# Altium PCB CH32F&Vx0xR-R1-1v2.PcbDoc (part 2 of 2)
Units mil, origin at the board's own origin, x right, y up, seen from the top; angles counter-clockwise.
Board outline 2913.39 x 3372 mil, 2 copper layers (Top Layer, Bottom Layer); 78 components, 107 nets, 422 pads, 592 vias.
Unrouted connection lines stored in the file: 10.
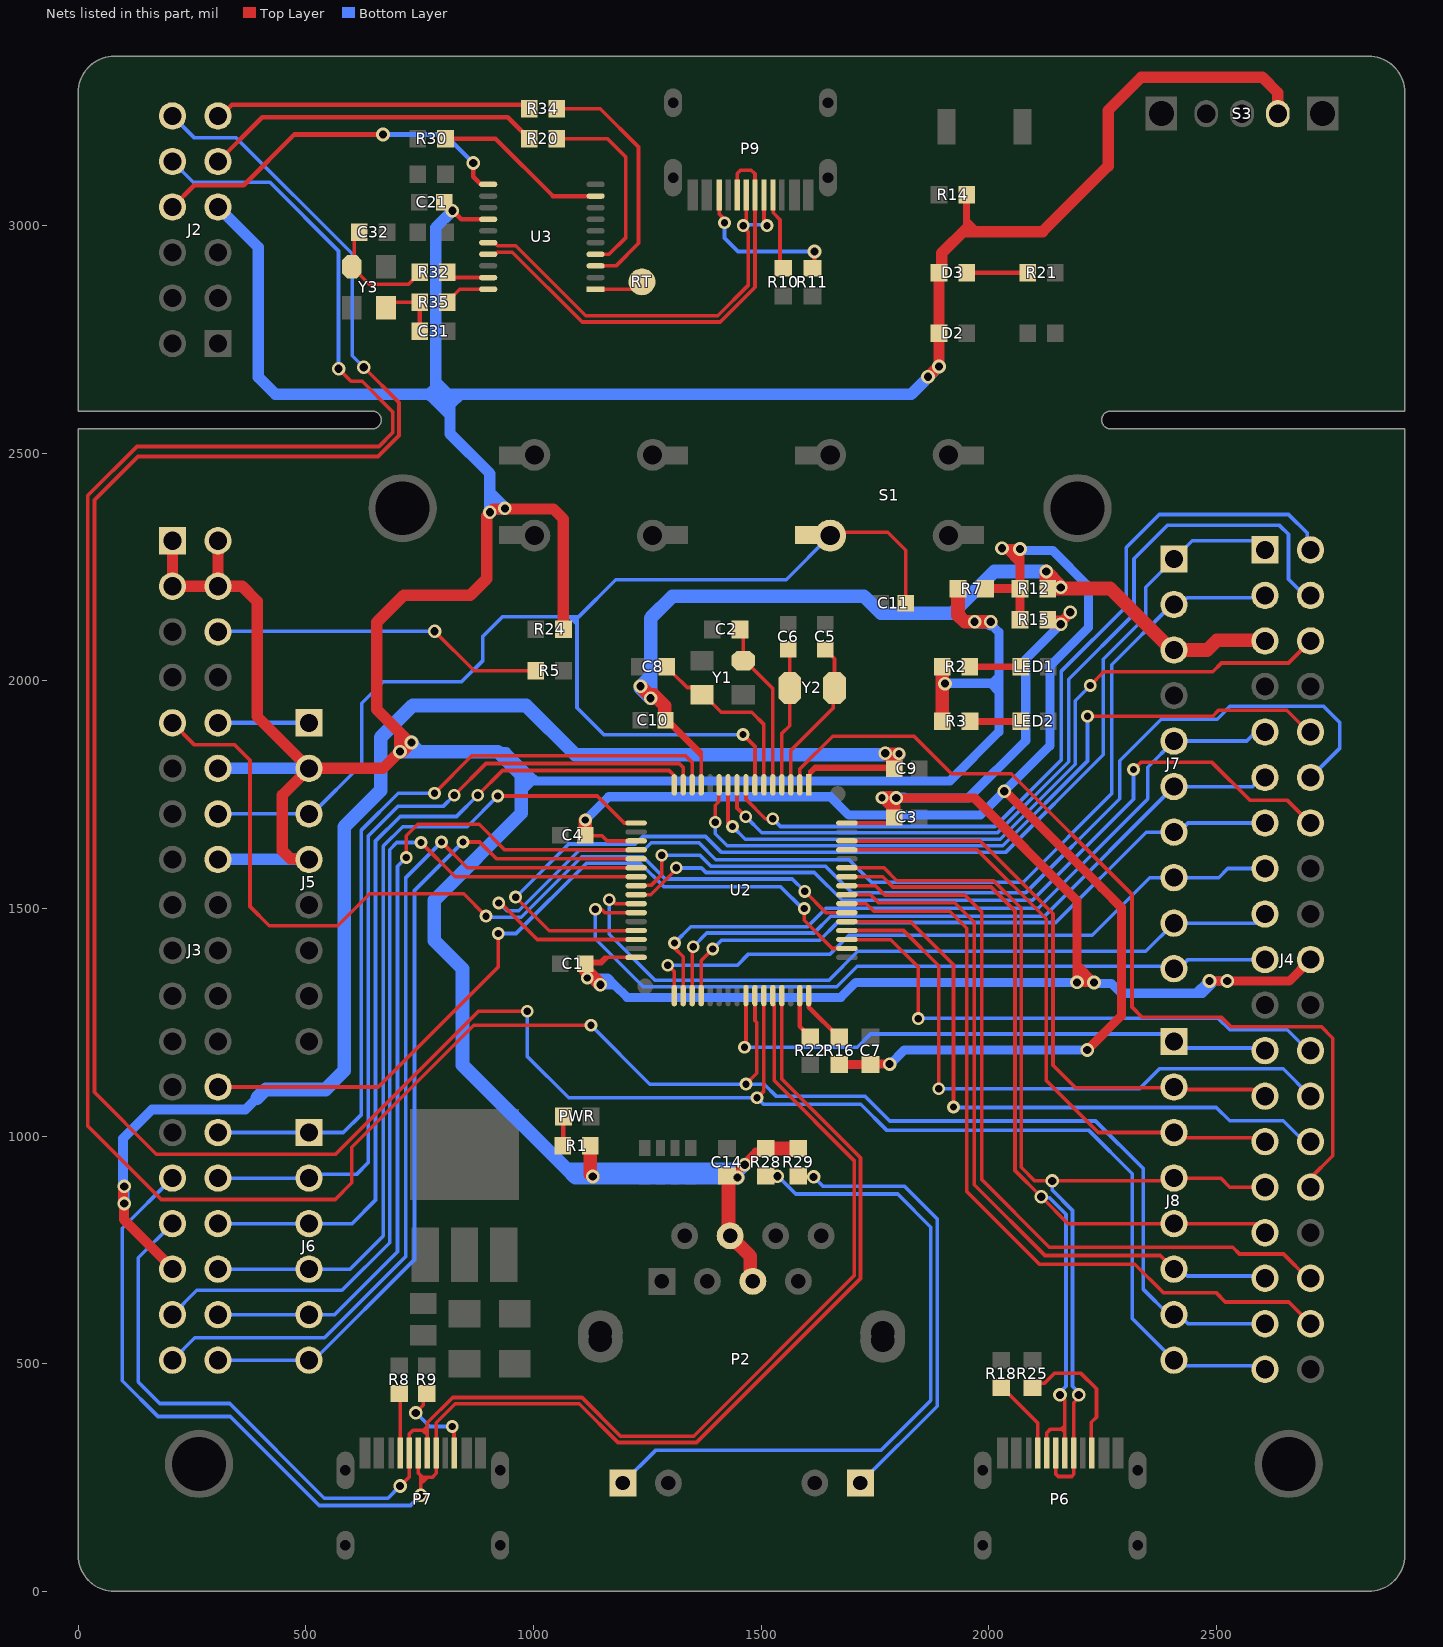
[diagram p2: the nets of this part, all layers, seen from the top]

## Via types
v1: diameter 24, hole 12, Top Layer to Bottom Layer, tented both sides, 436 vias
v2: diameter 30, hole 18, Top Layer to Bottom Layer, tented both sides, 83 vias
v3: diameter 28, hole 16, Top Layer to Bottom Layer, tented both sides, 73 vias

## Nets (pads, with @x,y where several pads share a name; then routed paths per layer and width w, separated by ;. In a path a pad name is that pad's centre, name@x,y a point inside that pad or via, vN(x,y) a via of type N, cw(c..) or ccw(c..) an arc to the next point about the centre after c; other vN are vias at no path point) (continued)
NetD3_2: D3.2 R21.2 | length 134.4
  Top Layer w10: D3.2@1951.15,2897 R21.2@2085.52,2897
NetJ3_6: J3.6 R5.1 | length 744.1
  Top Layer w8: v2(782.52,2109) 869.52,2022 R5.1@1004.89,2022
  Bottom Layer w8: J3.6@306.69,2107.81 319.24,2120.36 330.61,2109 v2(782.52,2109)
NetJ3_10: J3.10 J5.1 | length 200
  Bottom Layer w10: J3.10@306.69,1907.81 J5.1@506.69,1907.81
NetLED1_1: LED1.1 R2.2 | length 111.7
  Top Layer w15: R2.2@1958.15,2031 LED1.1@2069.89,2031
NetLED2_1: LED2.1 R3.2 | length 111.4
  Top Layer w15: R3.2@1958.52,1911 LED2.1@2069.89,1911
NetP2_9: P2.9 R28.2 | length 1540.9
  Top Layer w8: R28.2@1510.58,912.22 1535.3,912.22 v2(1535.52,912)
  Bottom Layer w8: P2.9@1196.06,237.91 1267.74,309.59 1762.84,309.59 1872.67,419.41 1872.67,799.96 1799.83,872.8 1575.96,872.8 1536.76,912 v2(1535.52,912)
NetP2_12: P2.12 R29.2 | length 999.2
  Top Layer w8: R29.2@1581.64,912.22 1587.88,918.46 1595.88,910.45 v2(1615.1,910.45)
  Bottom Layer w8: v2(1615.1,910.45) 1635.6,889.95 1814.62,889.95 1886.67,817.9 1886.67,406.86 P2.12@1717.72,237.91
NetP6_A5: P6.A5 R18.2 | length 164.9
  Top Layer w8: R18.2@2037.57,439.86 2107.6,369.83 P6.A5@2107.6,304.01
NetP6_B5: P6.B5 R25.2 | length 313.4
  Top Layer w8: R25.2@2095.87,447.25 2105.87,457.25 2122.48,457.25 2143.98,478.75 2202.63,478.75 2236.41,444.98 2236.41,382.33 2225.26,371.18 2225.26,304.46 P6.B5@2225.71,304.01
NetP7_A5: P7.A5 R8.2 | length 131.2
  Top Layer w8: P7.A5@707.36,304.01 R8.2@707.36,435.16
NetP7_B5: P7.B5 R9.2 | length 205.1
  Top Layer w8: v2(741,392) 757.91,408.91 757.91,427.57 R9.2@764.87,434.53 ; v3(821.51,362.04) 825.06,358.49 825.06,304.42 P7.B5@825.47,304.01 P7.B5@825.47,304.01
  Bottom Layer w8: v2(741,392) 742.13,392 772.09,362.04 v3(821.51,362.04)
NetP9_A5: P9.A5 R10.1 | length 180.8
  Top Layer w8: P9.A5@1525.81,3067.24 1526.21,3066.85 1526.21,3028.31 1541.39,3013.13 R10.1@1541.39,2892.86
NetP9_B5: P9.B5 R11.1 | length 355
  Top Layer w8: P9.B5@1407.7,3067.24 1407.7,3025.48 1419.49,3013.69 v3(1419.49,3006.6) v3@1419.49,2999.52 ; R11.1@1612.62,2906.21 1616.94,2910.53 v2(1616.94,2943.28)
  Bottom Layer w8: v3(1419.49,3006.6) 1419.49,2972.68 1448.89,2943.28 v2(1616.94,2943.28)
NetPWR_1: PWR.1 R1.1 | length 64.7
  Top Layer w10: R1.1@1064.15,978.99 1065.53,980.37 PWR.1@1065.53,1043.16
NetR16_2: R16.2 U2.48 | length 119.2
  Top Layer w10: U2.48@1604.33,1308.79 1604.68,1308.45 1604.68,1283.46 1670.29,1217.85 R16.2@1671.27,1217.85
NetR22_2: R22.2 U2.47 | length 101.1
  Top Layer w10: U2.47@1584.65,1308.79 1584.65,1240.91 1593.42,1232.14 1593.42,1231.16 1606.72,1217.85 R22.2@1607.71,1217.85
NRST: C11.2 J3.14 J5.3 pad.@1604.53,2320.31 S1.1 U2.7 | length 2751.7
  Top Layer w8: v3(1459.98,1882.03) 1486.22,1855.79 U2.7@1486.22,1771.55 ; S1.1@1651.77,2319.23 1658.87,2326.32 1778.22,2326.32 1817.54,2287.01 C11.2@1817.54,2170.72
  Bottom Layer w8: J3.14@306.69,1707.81 J5.3@506.69,1707.81 513.47,1707.81 622.57,1816.92 622.57,1950.66 670.02,1998.11 841.82,1998.11 888.64,2044.93 888.64,2098.07 931.1,2140.53 1080.01,2140.53 ; v3(1459.98,1882.03) 1154.35,1882.03 1095.42,1940.97 1095.42,2125.12 ; S1.1@1651.77,2319.23 1554.73,2222.18 1180.28,2222.18 1098.63,2140.53 ; 1080.01,2140.53 1098.63,2140.53 ; 1080.01,2140.53 1087.71,2132.83 ; 1087.71,2132.83 1090.93,2132.83 1095.42,2137.32 ; 1087.71,2132.83 1095.42,2125.12 ; 1095.42,2125.12 1095.42,2137.32 ; 1095.42,2137.32 1098.63,2140.53
OSC_IN: C32.2 R32.2 Y3.1 | length 258.7
  Top Layer w8: C32.2@617.19,2985.39 605.72,2973.91 605.72,2914.92 Y3.1@600.76,2909.96 639.24,2871.47 725.33,2871.47 750.06,2896.21 R32.2@750.06,2897.19
OSC_OUT: C31.2 R35.2 Y3.3 | length 143.3
  Top Layer w8: Y3.3@672.25,2835.83 676,2832.07 R35.2@750.06,2832.07
  Top Layer w10: C31.2@750.06,2768.11 R35.2@750.06,2832.07
PA0: J3.28 J6.1 U2.14 | length 1805.8
  Top Layer w8: v3(782.16,1753.23) 864.41,1835.48 1333.82,1835.48 1348.43,1820.87 U2.14@1348.43,1771.55
  Bottom Layer w8: J3.28@306.69,1007.81 J6.1@506.69,1007.81 581.92,1007.81 621.74,1047.63 621.74,1672.22 702.75,1753.23 v3(782.16,1753.23)
PA1: J3.30 J6.2 U2.15 | length 1861.5
  Top Layer w8: v3(825.69,1748.84) 895.41,1818.56 1319.98,1818.56 1328.74,1809.8 U2.15@1328.74,1771.55
  Bottom Layer w8: J3.30@306.69,907.81 J6.2@506.69,907.81 514.77,915.88 610.99,915.88 637.02,941.91 637.02,1659.43 701.89,1724.3 801.14,1724.3 v3(825.69,1748.84)
PA2: J3.32 J6.3 U2.16 | length 1901.5
  Top Layer w8: v3(877.52,1749) 931.59,1803.07 1297.61,1803.07 1307.15,1793.53 1307.15,1792.2 1309.06,1790.3 U2.16@1309.06,1771.55
  Bottom Layer w8: J3.32@306.69,807.81 J6.3@506.69,807.81 601.15,807.81 652.8,859.46 652.8,1648.21 706.84,1702.25 830.77,1702.25 v3(877.52,1749)
PA3: J3.34 J6.4 U2.17 | length 1875.2
  Top Layer w8: v3(921.52,1747) 1139.74,1747 1198.94,1687.81 U2.17@1225.32,1687.81
  Bottom Layer w8: J3.34@306.69,707.81 J6.4@506.69,707.81 596.58,707.81 669.6,780.83 669.6,1637.11 712.28,1679.79 854.31,1679.79 v3(921.52,1747)
PA4: J3.36 J6.5 U2.20 | length 1912.1
  Top Layer w8: v3(720.52,1612) 720.52,1660.01 745.53,1685.02 880.35,1685.02 936.62,1628.75 U2.20@1225.32,1628.75
  Bottom Layer w8: J3.36@306.69,607.81 562.84,607.81 701.17,746.14 701.17,1592.65 v3(720.52,1612)
PA5: J3.38 J6.6 U2.21 | length 1880.4
  Top Layer w8: v3(844.86,1646.13) 881.4,1646.13 918.46,1609.07 U2.21@1225.32,1609.07
  Bottom Layer w8: J3.38@306.69,507.81 517.18,507.81 738.34,728.97 738.34,1539.62 v3(844.86,1646.13)
PA6: J3.37 U2.22 | length 2000.9
  Top Layer w8: v3(797.52,1646) 854.14,1589.38 U2.22@1225.32,1589.38
  Bottom Layer w8: J3.37@206.69,507.81 255.83,556.94 540.48,556.94 719.5,735.96 719.5,1567.98 v3(797.52,1646)
PA7: J3.35 U2.23 | length 1984.8
  Top Layer w8: v3(752.81,1644.84) 827.95,1569.7 U2.23@1225.32,1569.7
  Bottom Layer w8: J3.35@206.69,607.81 260.02,661.14 578.93,661.14 683.86,766.07 683.86,1629.02 699.67,1644.84 v3(752.81,1644.84)
PA8: J4.23 J8.1 U2.41 | length 1284.3
  Top Layer w8: v3@1466.54,1195 U2.41@1466.54,1308.79
  Bottom Layer w8: v3(1463.52,1195) 1710.84,1195 1740.25,1224.41 2390.09,1224.41 J8.1@2406.69,1207.81 2421.08,1193.42 2601.08,1193.42 J4.23@2606.69,1187.81
PA9: J2.10 J4.35 J8.7 U2.42 | length 6510.8
  Top Layer w8: v2(571.65,2685.74) 599.08,2658.32 623.47,2658.32 690.29,2591.5 690.29,2544.8 660.5,2515.01 128.7,2515.01 20.76,2407.06 20.76,1022.01 182.06,860.71 564.06,860.71 600.67,897.31 600.67,975.62 868.61,1243.56 v3(1126.11,1243.56) ; v3(1466.57,1114.25) 1466.57,1114.52 1490,1137.95 1490,1249.86 1486.22,1253.64 U2.42@1486.22,1308.79
  Bottom Layer w8: J2.10@206.69,3141 252.48,3095.21 420.74,3095.21 571.47,2944.48 571.47,2685.93 v2(571.65,2685.74) ; v3(1126.11,1243.56) 1255.43,1114.25 v3(1466.57,1114.25) 1506.54,1114.25 1533.56,1087.23 1728.67,1087.23 1782.53,1033.37 2234.4,1033.37 2339.57,928.2 2339.57,663.28 2395.04,607.81 J8.7@2406.69,607.81 2417.38,607.81 2437.38,587.81 J4.35@2606.69,587.81
PA10: J2.12 J4.37 J8.8 U2.43 | length 6549.2
  Top Layer w8: v2(626.82,2688.76) 704.29,2611.29 704.29,2539 658.11,2492.82 131.15,2492.82 35.61,2397.28 35.61,1096.07 171.32,960.36 564.73,960.36 878.78,1274.41 v3(986.27,1274.41) ; v3(1490.86,1084.31) 1505.91,1099.35 U2.43@1505.91,1308.79
  Bottom Layer w8: J2.12@206.69,3241 254.93,3192.76 347.08,3192.76 601.62,2938.22 601.62,2713.96 v2(626.82,2688.76) ; v3(986.27,1274.41) 986.27,1175.01 1076.96,1084.31 v3(1490.86,1084.31) 1505.16,1070.01 1718.77,1070.01 1776.23,1012.56 2220.19,1012.56 2315.23,917.51 2315.23,599.27 J8.8@2406.69,507.81 2420.76,507.81 2433.02,495.55 2598.95,495.55 J4.37@2606.69,487.81
PA11: J3.31 P7.A7 P7.B7 U2.44 | length 3159.6
  Top Layer w8: v2(706.77,231.57) 727.25,252.04 P7.B7@727.25,304.01 ; P7.B7@727.05,304.01 727.05,345.56 735.3,353.81 758.4,353.81 ; P7.A7@766.62,303.81 766.62,343.71 ; U2.44@1525.59,1308.79 1525.59,1290.05 1528.56,1287.07 1528.56,1122.15 1704.03,946.69 1704.03,693.06 1351.98,341.01 1191.05,341.01 1106.12,425.93 822.14,425.93 766.62,370.41 766.62,362.02 ; 758.4,353.81 765.51,353.81 766.62,352.69 ; 758.4,353.81 758.4,351.92 766.62,343.71 ; 758.4,353.81 766.62,362.02 ; 766.62,343.71 766.62,352.69 ; 766.62,352.69 766.62,362.02
  Bottom Layer w8: J3.31@206.69,807.81 131.55,732.66 131.55,460.08 179.04,412.59 332.27,412.59 540.05,204.81 680.02,204.81 v2(706.77,231.57)
PA12: J3.29 P7.A6 P7.B6 U2.45 | length 3370.3
  Top Layer w8: P7.A6@746.93,303.81 746.93,259.83 752.4,254.36 ; v2(752.4,211.23) 752.4,236.26 ; U2.45@1545.28,1308.79 1545.28,1125.24 1718.03,952.49 1718.03,687.27 1357.77,327.01 1185.25,327.01 1100.32,411.93 827.94,411.93 786.1,370.1 P7.B6@786.1,304.01 786.3,303.81 786.3,259.26 777.81,250.77 766.9,250.77 ; 752.4,236.26 752.4,254.36 ; 752.4,236.26 759.65,243.51 ; 752.4,254.36 756,250.77 ; 756,250.77 766.9,250.77 ; 756,250.77 759.65,247.11 759.65,243.51 ; 759.65,243.51 766.9,250.77
  Bottom Layer w8: J3.29@206.69,907.81 96.59,797.71 96.59,462.39 174.79,384.19 333.38,384.19 528.98,188.58 729.75,188.58 v2(752.4,211.23)
PA15: J3.26 U2.50 | length 1720.9
  Top Layer w8: J3.26@306.69,1107.81 658.87,1107.81 922.52,1371.46 v3(922.52,1445) ; v3(1594.53,1499.77) 1594.53,1474.04 1656.35,1412.22 U2.50@1688.07,1412.22
  Bottom Layer w8: v3(922.52,1445) 961.46,1445 1116.14,1599.68 1234.44,1599.68 1286.35,1547.78 1542.5,1547.78 1590.51,1499.77 v3(1594.53,1499.77)
PB0: J4.17 J7.9 U2.26 | length 1680.9
  Top Layer w8: v3(1166.28,1518.98) 1171.45,1518.98 1179.79,1510.64 U2.26@1225.32,1510.64
  Bottom Layer w8: v3(1166.28,1518.98) 1166.28,1443.29 1267.54,1342.03 1648.5,1342.03 1712.34,1405.87 2344.75,1405.87 J7.9@2406.69,1467.81 2586.69,1467.81 J4.17@2606.69,1487.81
PB1: J4.19 J7.10 U2.27 | length 1706.2
  Top Layer w8: v3(1135.73,1498.54) 1148.94,1498.54 1156.52,1490.96 U2.27@1225.32,1490.96
  Bottom Layer w8: v3(1135.73,1498.54) 1135.73,1433.35 1241.05,1328.03 1666.05,1328.03 1710.95,1372.93 2387.5,1372.93 2398.33,1362.1 2411.67,1362.1 2437.38,1387.81 J4.19@2606.69,1387.81
PB3: J4.36 U2.55 | length 1739.5
  Top Layer w8: U2.55@1688.07,1510.64 1730.88,1510.64 1747.71,1493.82 1914.11,1493.82 1951.5,1456.43 1951.5,878.43 2111.45,718.48 2320.7,718.48 2382.88,656.3 2498.93,656.3 2519.49,635.74 2658.77,635.74 J4.36@2706.69,587.81
PB4: J4.33 J8.6 U2.56 | length 1605.5
  Top Layer w8: U2.56@1688.07,1530.33 1739.86,1530.33 1757.71,1512.48 1925.37,1512.48 1967.84,1470.01 1967.84,893.23 2123.16,737.91 2376.6,737.91 J8.6@2406.69,707.81
  Bottom Layer w8: J8.6@2406.69,707.81 2420.76,707.81 2435.79,692.78 2601.72,692.78 J4.33@2606.69,687.81
PB5: J4.34 U2.57 | length 1720.1
  Top Layer w8: U2.57@1688.07,1550.01 1751.05,1550.01 1771.41,1529.65 1947.07,1529.65 1984.28,1492.44 1984.28,904.58 2132.77,756.09 2535.79,756.09 2550.74,741.14 2647.4,741.14 2700.73,687.81 J4.34@2706.69,687.81
PB6: J4.31 J8.5 P6.A7 P6.B7 U2.58 | length 2272.7
  Top Layer w8: U2.58@1688.07,1569.7 1767.05,1569.7 1789.52,1547.23 2004.65,1547.23 2057.35,1494.53 2057.35,924.54 v2(2115,866.89) 2174.08,807.81 J8.5@2406.69,807.81 J4.31@2606.69,807.81 ; P6.B7@2127.28,304.01 2127.28,348 2135.7,356.41 2159.33,356.41 ; v2(2156.25,431.6) 2166.65,421.2 2166.65,363.74 ; P6.A7@2166.65,304.01 2166.65,350.13 ; 2159.33,356.41 2160.37,356.41 2166.65,350.13 ; 2159.33,356.41 2166.65,363.74 ; 2166.65,350.13 2166.65,363.74
  Bottom Layer w8: v2(2115,866.89) 2117.21,864.68 2133.31,864.68 2169.64,828.36 2169.64,450.75 2156.25,437.37 v2(2156.25,431.6)
PB7: J4.29 J8.4 P6.A6 P6.B6 U2.59 | length 2304.6
  Top Layer w8: U2.59@1688.07,1589.38 1769.72,1589.38 1797.87,1561.23 2010.45,1561.23 2071.35,1500.33 2071.35,931.33 2101.08,901.59 v2(2139.18,901.59) 2400.48,901.59 J8.4@2406.69,907.81 2509.47,907.81 2529.47,887.81 J4.29@2606.69,887.81 ; P6.A6@2146.97,304.01 2146.97,257.92 2152.56,252.34 2181.65,252.34 2186.34,257.02 P6.B6@2186.34,304.01 2186.34,414.57 v2@2197.42,425.65
  Bottom Layer w8: v2@2138.53,901.24 2139.14,900.63 2139.14,881.49 2183.89,836.75 2183.89,450.6 2197.42,437.07 v2(2197.42,431.6)
PB8: J4.27 J8.3 U2.61 | length 1392.4
  Top Layer w8: U2.61@1688.07,1628.75 1974.84,1628.75 2125.84,1477.75 2125.84,1122.14 2240.17,1007.81 2420.76,1007.81 2431.99,996.58 2597.92,996.58 J4.27@2606.69,987.81
PB9: J4.25 J8.2 U2.62 | length 1347.2
  Top Layer w8: U2.62@1688.07,1648.44 1980.95,1648.44 2140.94,1488.45 2140.94,1155.75 2190.61,1106.08 2404.96,1106.08 J8.2@2406.69,1107.81 2412.15,1102.35 2578.08,1102.35 2592.62,1087.81 J4.25@2606.69,1087.81
PB10: J4.1 J7.1 U2.29 | length 2455.7
  Top Layer w8: v3(960.52,1525) 1034.52,1451 1224.73,1451 U2.29@1225.32,1451.59
  Bottom Layer w8: v3(960.52,1525) 1077.2,1641.68 1223.56,1641.68 1240.1,1658.22 1377.6,1658.22 1411.91,1623.91 2037.89,1623.91 2251.47,1837.49 2251.47,2047.47 2344.61,2140.61 2344.61,2205.72 2380.69,2241.81 2446.69,2307.81 J4.1@2606.69,2307.81
PB11: J4.3 J7.2 U2.30 | length 2549.4
  Top Layer w8: v3(923.63,1511.98) 927.74,1511.98 1007.82,1431.9 U2.30@1225.32,1431.9
  Bottom Layer w8: v3(923.63,1511.98) 923.88,1511.98 941.01,1494.86 967.35,1494.86 1100.17,1627.68 1241.98,1627.68 1258.51,1644.22 1363.32,1644.22 1400.39,1607.16 1692.77,1607.16 1742.11,1557.81 2075.33,1557.81 2270.11,1752.59 2270.11,2035.5 2402.42,2167.81 2420.76,2167.81 2435.73,2182.78 2601.66,2182.78 J4.3@2606.69,2187.81
PB12: J4.15 J7.8 U2.33 | length 1472.3
  Top Layer w8: v3(1294.92,1375.56) 1309.06,1361.43 U2.33@1309.06,1308.79
  Bottom Layer w8: v3(1294.92,1375.56) 1447.9,1375.56 1472.23,1399.9 1651.51,1399.9 1692.73,1441.12 2227.03,1441.12 2353.72,1567.81 J7.8@2406.69,1567.81 2504.78,1567.81 2524.78,1587.81 J4.15@2606.69,1587.81
PB13: J4.9 J7.5 U2.34 | length 1661.5
  Top Layer w8: v3(1309.63,1424.33) 1309.63,1413.18 1328.74,1394.07 U2.34@1328.74,1308.79
  Bottom Layer w8: v3(1309.63,1424.33) 1345.37,1460.07 1601.87,1460.07 1642.11,1500.31 2108.75,1500.31 2349.17,1740.73 2349.17,1810.29 J7.5@2406.69,1867.81 2566.69,1867.81 J4.9@2606.69,1907.81
PB14: J4.11 J7.6 U2.35 | length 1519.6
  Top Layer w8: U2.35@1348.43,1308.79 1348.43,1416.12 v3(1350.67,1416.12)
  Bottom Layer w8: v3(1350.67,1416.12) 1380.63,1446.07 1615.91,1446.07 1653.01,1483.18 2122.06,1483.18 J7.6@2406.69,1767.81 2579.66,1767.81 2599.66,1787.81 J4.11@2606.69,1787.81
PB15: J4.13 J7.7 U2.36 | length 1440.6
  Top Layer w8: U2.36@1368.11,1308.79 1368.11,1385.58 v3(1393.36,1410.83)
  Bottom Layer w8: v3(1393.36,1410.83) 1412.72,1430.19 1628.84,1430.19 1667.81,1469.16 2146.88,1469.16 2345.53,1667.81 2417.38,1667.81 2437.38,1687.81 J4.13@2606.69,1687.81
PC0: J4.2 U2.8 | length 1820.1
  Top Layer w8: U2.8@1466.54,1771.55 1466.54,1739.82 1509,1697.36 v3(1525.18,1697.36)
  Bottom Layer w8: v3(1525.18,1697.36) 1542.39,1680.15 2013.38,1680.15 2158.78,1825.55 2158.78,2020.45 2301.7,2163.37 2301.7,2292.8 2374.52,2365.63 2658.44,2365.63 2699.78,2324.29 2699.78,2294.72 J4.2@2706.69,2287.81
PC1: J4.4 U2.9 | length 1912.6
  Top Layer w8: U2.9@1446.85,1771.55 1446.85,1720.6 1466.21,1701.24 v3@1466.21,1699.81
  Bottom Layer w8: v3@1466.21,1699.81 1467.64,1699.81 1501.3,1666.15 2019.18,1666.15 2175.49,1822.46 2175.49,2003.39 2318.81,2146.71 2318.81,2268.37 2391.95,2341.51 2638.67,2341.51 2658.28,2321.91 2658.28,2223.36 2693.83,2187.81 J4.4@2706.69,2187.81
  other v3: 1466.21,1701.81
PC2: J4.6 U2.10 | length 1636.3
  Top Layer w8: U2.10@1427.17,1771.55 1427.17,1689.93 v3@1435.17,1681.93 ; v3(2222.52,1990) 2252.52,2020 2491.68,2020 2511.04,2039.36 2658.24,2039.36 J4.6@2706.69,2087.81
  Bottom Layer w8: v3(1437.17,1679.93) 1464.95,1652.15 2024.98,1652.15 2189.81,1816.98 2189.81,1956.39 v3@2222.97,1989.55
PC3: J4.10 U2.11 | length 1618.2
  Top Layer w8: v3(1399.01,1689.52) 1399.01,1726.58 1406.95,1734.51 1406.95,1771.01 U2.11@1407.48,1771.55 ; v3(2216.67,1922.43) 2491.68,1922.43 2504.52,1935.26 2654.59,1935.26 2687.39,1902.47 J4.10@2701.36,1902.47
  Bottom Layer w8: v3(1399.01,1689.52) 1399.01,1664.41 1425.26,1638.15 2030.78,1638.15 2216.67,1824.04 v3(2216.67,1922.43)
PC4: J4.12 U2.24 | length 2013.2
  Top Layer w8: U2.24@1225.32,1550.01 1226.04,1550.74 1257.77,1550.74 1281.52,1574.49 v3(1281.52,1617)
  Bottom Layer w8: v3(1281.52,1617) 1365.58,1617 1389.42,1593.16 1640.87,1593.16 1699.09,1534.94 2081.45,1534.94 2287.69,1741.18 2287.69,1824.68 2378.62,1915.61 2501.57,1915.61 2530.59,1944.64 2734.44,1944.64 2771.22,1907.86 2771.22,1852.33 J4.12@2706.69,1787.81
PC5: J4.14 U2.25 | length 1756.7
  Top Layer w8: U2.25@1225.32,1530.33 1257.15,1530.33 1313.21,1586.39 v3(1313.21,1589.74) ; v3(2317.89,1805.29) 2333.55,1820.95 2490.15,1820.95 2572.93,1738.17 2655.01,1738.17 2705.37,1687.81 J4.14@2706.69,1687.81
  Bottom Layer w8: v3(1313.21,1589.74) 1314.01,1588.94 1368.61,1588.94 1378.61,1578.94 1616.72,1578.94 1677.8,1517.86 2095.89,1517.86 2317.89,1739.86 v3(2317.89,1805.29)
PC6_305: R30.2 U3.9 | length 382.2
  Top Layer w10: R30.2@806.33,3191.22 916.35,3191.22 1042.51,3065.06 U3.9@1136.27,3065.06
PC10: J4.24 U2.51 | length 1186.6
  Top Layer w8: U2.51@1688.07,1431.9 1688.31,1431.66 1784.75,1431.66 1844.85,1371.56 v3(1844.85,1258.11)
  Bottom Layer w8: v3(1844.85,1258.11) 1845.32,1258.58 2504.4,1258.58 2529.04,1233.94 2655.39,1233.94 2701.52,1187.81 J4.24@2706.69,1187.81
PC11: J4.26 U2.52 | length 1363.9
  Top Layer w8: U2.52@1688.07,1451.59 1812.51,1451.59 1889.98,1374.12 v3(1889.98,1103.94)
  Bottom Layer w8: v3(1889.98,1103.94) 2331.18,1103.94 2375.05,1147.81 2646.69,1147.81 J4.26@2706.69,1087.81
PC12: J4.28 U2.53 | length 1401.8
  Top Layer w8: U2.53@1688.07,1471.27 1827.51,1471.27 1922.52,1376.26 v3(1922.52,1064)
  Bottom Layer w8: v3(1922.52,1064) 1923.61,1062.91 2499.88,1062.91 2529.27,1033.51 2646.92,1033.51 2692.62,987.81 J4.28@2706.69,987.81
PC13: J4.30 U2.2 | length 1983
  Top Layer w8: U2.2@1584.65,1771.55 1584.65,1806.35 1656.94,1878.65 1835.64,1878.65 1918.22,1796.06 2048.97,1796.06 2314.39,1530.64 2314.39,1283.6 2337.24,1260.75 2511.2,1260.75 2531.32,1240.62 2730.2,1240.62 2755.72,1215.11 2755.72,956.83 J4.30@2706.69,907.81
PC14: C5.1 U2.3 Y2.1 | length 341.6
  Top Layer w8: U2.3@1564.96,1771.55 1564.96,1847.07 1658.28,1940.39 1658.28,1977.15 Y2.1@1661,1979.88 ; C5.1@1640.33,2069.42 1661,2048.74 Y2.1@1661,1984.51
PC15: C6.1 U2.4 Y2.2 | length 301.9
  Top Layer w8: U2.4@1545.28,1771.55 1545.28,1884.4 1562.58,1901.71 Y2.2@1562.58,1979.88 ; C6.1@1559.01,2069.42 1562.58,2065.85 Y2.2@1562.58,1984.51
PD0: C2.2 U2.5 Y1.1 | length 373.6
  Top Layer w8: C2.2@1453.31,2112.89 1460.4,2105.8 Y1.1@1460.4,2044.51 1464.33,2044.51 1525.59,1983.25 U2.5@1525.59,1771.55
PD0_305: R32.1 U3.19 | length 97.6
  Top Layer w8: R32.1@806.42,2894.92 815.38,2885.96 U3.19@900.27,2885.96
PD1: C8.2 U2.6 Y1.3 | length 399.2
  Top Layer w8: C8.2@1292.55,2031.15 1292.55,2030.17 1306.86,2015.86 1337.32,1985.4 1354.16,1985.4 Y1.3@1369.84,1969.71 1373.78,1969.71 1412.24,1931.25 1478.95,1931.25 1505.91,1904.3 U2.6@1505.91,1771.55
PD1_305: R35.1 U3.20 | length 98.2
  Top Layer w8: R35.1@816.84,2833.22 816.84,2839.2 838,2860.36 U3.20@900.27,2860.36
PD2: J3.9 U2.54 | length 2010.5
  Top Layer w8: J3.9@206.69,1907.81 255.1,1859.4 343.47,1859.4 376.98,1825.9 376.98,1504.52 419.63,1461.88 569.65,1461.88 639.92,1532.15 846.64,1532.15 v3(895.51,1483.28) ; v3(1595.49,1537.62) 1642.15,1490.96 U2.54@1688.07,1490.96
  Bottom Layer w8: v3(895.51,1483.28) 897.93,1480.86 973.17,1480.86 1105.99,1613.68 1240.24,1613.68 1289.19,1564.74 1568.37,1564.74 v3(1595.49,1537.62)
RST0: J2.8 U3.11 | length 822.4
  Top Layer w10: J2.8@206.69,3041 254.49,3088.8 363.11,3088.8 474.56,3200.25 v2(669.17,3200.25) ; v2(867.45,3137.52) 867.45,3107.67 884.08,3091.04 899.88,3091.04 U3.11@900.27,3090.66
  Bottom Layer w10: v2(669.17,3200.25) 804.73,3200.25 v2(867.45,3137.52)
RT: RT.1 U3.1 | length 108.4
  Top Layer w8: U3.1@1136.27,2860.36 1221.8,2860.36 RT.1@1237.99,2876.56
RX_OUT: J2.9 R20.1 | length 743.7
  Top Layer w10: J2.9@306.69,3141 403.88,3238.19 943.15,3238.19 975.82,3205.51 976.81,3205.51 990.11,3192.21 R20.1@990.11,3191.22
TX_OUT: J2.11 R34.1 | length 696.9
  Top Layer w10: J2.11@306.69,3241 313.29,3241 337.55,3265.26 981.92,3265.26 R34.1@990.11,3257.07
UART3_RX: R20.2 U3.4 | length 427.1
  Top Layer w8: R20.2@1050.74,3191.22 1161.86,3191.22 1202.81,3150.27 1202.81,2974.09 1165.88,2937.16 U3.4@1136.27,2937.16
UART3_TX: R34.2 U3.3 | length 541.2
  Top Layer w8: R34.2@1050.74,3257.07 1146.43,3257.07 1230.51,3173 1230.51,2961.13 1180.94,2911.56 U3.3@1136.27,2911.56
USB_N: P9.A7 P9.B7 U3.16 | length 993.6
  Top Layer w8: U3.16@900.27,2962.76 914.01,2962.76 920.95,2955.82 960.98,2955.82 1114.59,2802.21 1404.36,2802.21 1471.9,2869.75 1471.9,2985.4 1460.4,2996.9 v3(1460.4,3000.09) 1460.4,3005.5 1466.76,3011.86 P9.A7@1466.76,3067.24 ; P9.B7@1506.13,3067.24 1506.13,3013.61 1508.68,3011.05 1508.68,3009.33 1510.92,3007.09 v3@1512.51,3007.09 ; v3@1512.51,2994.68 v3(1512.51,3000.09)
  Bottom Layer w8: v3(1460.4,3000.09) 1462.06,3001.75 1510.85,3001.75 v3(1512.51,3000.09)
USB_P: P9.A6 P9.B6 U3.17 | length 1025.5
  Top Layer w8: U3.17@900.27,2937.16 915.35,2937.16 920.01,2941.82 953.11,2941.82 1106.72,2788.21 1410.16,2788.21 1486.44,2864.5 P9.A6@1486.44,3067.24 1486.44,3113.79 1478.43,3121.8 1454.5,3121.8 1447.07,3114.38 P9.B6@1447.07,3067.24
VBAT: C9.1 J3.33 U2.1 | length 3418.8
  Top Layer w8: U2.1@1604.21,1792.09 U2.1@1606.24,1794.12 ; U2.1@1604.33,1771.55 1606.24,1773.45 U2.1@1606.24,1794.12 ; C9.1@1792.54,1803.24 1791.84,1803.94 1789.51,1806.27 1618.39,1806.27 ; C9.1@1792.54,1812.24 1791.84,1812.24 1618.19,1812.24 1612.21,1806.27 ; U2.1@1606.24,1794.12 1606.24,1800.29 1612.21,1806.27 ; U2.1@1606.24,1794.12 1618.39,1806.27 ; 1612.21,1806.27 1618.39,1806.27
  Top Layer w22: v2@99.79,849.47 99.79,816.82 206.69,709.92 J3.33@206.69,707.81 ; v2(100.98,852) 99.8,852 98.19,853.61 98.19,888 99.8,889.61 v2(100.98,889.61)
  Top Layer w30: v2(1772.28,1841.15) 1774.4,1839.02 1801.84,1839.02 1795.54,1832.73 C9.1@1795.54,1806.24 ; C9.1@1791.84,1803.94 1791.84,1812.24 v3@1791.84,1838.02
  Bottom Layer w22: v2@98.19,889.54 100.98,886.75 v2(100.98,852) ; v2(100.98,889.61) 98.12,892.47 98.12,994.52 161.8,1058.2 367.23,1058.2 392.61,1083.58
  Bottom Layer w30: 392.61,1083.58 411.59,1102.56 542.75,1102.56 583.71,1143.53 583.71,1678.94 664.03,1759.26 664.03,1875.71 734.31,1945.99 983.53,1945.99 1091.5,1838.02 1772.28,1838.02 v3@1801.84,1838.02
  other v3: 1802.84,1840.02
VCC: C14.2 C21.1 D2.1 D3.1 J2.7 J3.1 J3.2 J3.3 J3.4 J3.12 J3.16 J5.2 J5.4 P2.4 P2.5 R1.2 R2.1 R3.1 R7.1 R14.2 R24.2 R28.1 R29.1 S3.3 U3.14 | length 12187.3
  Top Layer w10: C21.1@803.51,3051.15 816.51,3038.15 816.51,3038.06 v2(821.68,3032.89) 840.71,3013.86 U3.14@900.27,3013.86
  Top Layer w15: 1891.01,2940.62 1951.15,3000.76 ; 1944.53,2987.01 1951.15,2993.63 1951.15,3000.76 ; R14.2@1951.15,3067.51 1951.15,3011.52 ; 1953.15,3002.76 1951.15,3000.76 ; 1975.66,2987.01 1951.15,3011.52 ; 1951.15,3000.76 1951.15,3011.52
  Top Layer w20: v2(1448.21,909.09) 1448.21,923.89 1488.87,964.55 1502.27,964.55 R28.1@1510.58,972.85
  Top Layer w25: J3.1@206.69,2307.81 J3.3@206.69,2207.81 J3.4@306.69,2207.81 ; J3.2@306.69,2307.81 J3.4@306.69,2207.81 ; J5.4@506.69,1607.81 505.85,1608.65 466.45,1608.65 448.25,1626.85 448.25,1749.37 J5.2@506.69,1807.81 ; v2@705.5,1844.27 669.04,1807.81 J5.2@506.69,1807.81 ; v2(706.46,1844.64) 705.5,1845.6 705.5,1887.02 ; v2(731.65,1864.73) 729.01,1864.73 728.4,1864.12 705.5,1887.02 ; R24.2@1065.52,2113 1065.52,2355.37 1043.43,2377.45 936.93,2377.45 910.88,2377.45 v2(904.06,2370.63) 904.06,2369.28 897.23,2362.45 897.23,2224.53 860.84,2188.14 714.9,2188.14 655.49,2128.73 655.49,1937.03 705.5,1887.02 ; v2(1866.36,2668.2) v2@1890.52,2692.36 ; v2(1890.52,2690.51) v2@1890.52,2692.36 ; 1890.52,2727.25 v2@1890.52,2692.36 ; S3.3@2634.96,3246 2634.96,3291.72 2600.47,3326.21 2335.24,3326.21 2261.96,3252.94 2261.96,3130.87 2118.1,2987.01 1975.66,2987.01 1944.53,2987.01 1896.33,2938.81 1896.33,2902.81 D3.1@1890.52,2897 D2.1@1890.52,2764 v2@1890.52,2692.36 ; J3.4@306.69,2207.81 360,2207.81 392.66,2175.15 392.66,1921.84 J5.2@506.69,1807.81
  Top Layer w30: v2(706.46,1844.64) 709.46,1844.64 709.46,1845.17 v2@728.4,1864.12 ; R1.2@1124.78,978.99 1124.78,916.39 v2(1129.83,911.34) ; C14.2@1428.24,908.92 1428.24,784.35 P2.4@1431.69,780.9 1476.13,736.46 1476.13,686.46 P2.5@1481.69,680.9 ; R28.1@1510.58,972.85 R29.1@1581.64,972.85 ; R3.1@1897.89,1911 1897.71,1911.19 1897.71,2030.82 R2.1@1897.52,2031 R2.1@1900.83,2034.31 ; R7.1@1932.23,2203.94 R7.1@1932.23,2202.87 1932.23,2144.41 1946.95,2129.69 v2(1968.74,2129.69) v2(2004.23,2129.69)
  Bottom Layer w20: 921.18,1844.64 939.97,1844.64 1000.51,1784.1 ; 972.83,1756.42 1000.51,1784.1 ; 972.83,1784.1 1000.51,1784.1 ; 1000.51,1780.1 1914.3,1780.1 2022.12,1887.92 2022.12,1976.63 ; v2(1903.73,1993.95) 1904.54,1994.76 2003.99,1994.76 ; v2(2004.23,2129.69) 2004.23,2125.15 2022.12,2107.26 2022.12,2009.5 ; 2003.99,1994.76 2007.38,1994.76 ; 2003.99,1994.76 2022.12,1976.63 ; 2007.38,1994.76 2022.12,1994.76 ; 2007.38,1994.76 2022.12,2009.5 ; 2022.12,1976.63 2022.12,1994.76 ; 2022.12,1994.76 2022.12,2009.5
  Bottom Layer w25: J3.16@306.69,1607.81 J5.4@506.69,1607.81 ; J3.12@306.69,1807.81 J5.2@506.69,1807.81 ; J2.7@306.69,3041 395.48,2952.22 395.48,2667.01 432.83,2629.66 770.66,2629.66 ; v2(821.68,3032.89) 821.68,3032.58 784.71,2995.61 784.71,2656.94 ; v2@1866.36,2667.98 v2(1866.36,2668.2) ; v2(1890.52,2690.51) 1829.68,2629.66 839.12,2629.66 ; 770.66,2629.66 784.71,2643.71 ; 770.66,2629.66 784.71,2629.66 ; 770.66,2629.66 784.71,2615.61 ; 784.71,2615.61 816.4,2583.92 ; 784.71,2615.61 784.71,2629.66 ; 784.71,2629.66 784.71,2643.71 ; 784.71,2629.66 793.68,2629.66 ; 784.71,2643.71 784.71,2656.94 ; 784.71,2656.94 811.99,2629.66 ; 793.68,2629.66 811.99,2629.66 ; 793.68,2629.66 816.4,2606.94 ; 811.99,2629.66 839.12,2629.66 ; 811.99,2629.66 816.4,2625.25 816.4,2606.94 ; 816.4,2583.92 816.4,2606.94 ; 816.4,2583.92 816.4,2543.08 904.06,2455.42 904.06,2413.19 ; 816.4,2606.94 839.12,2629.66 ; 904.06,2413.19 936.93,2380.33 v2(936.93,2378.97) 935.97,2378.02 912.8,2378.02 905.41,2370.63 v2(904.06,2370.63) 904.06,2413.19
  Bottom Layer w30: v2(706.46,1844.64) 726.54,1864.73 v2(731.65,1864.73) 731.65,1860.87 747.88,1844.64 ; v2@709.46,1844.64 747.88,1844.64 ; v2(1448.21,909.09) v2@1435.99,909.09 ; v2(1463.9,937) v2@1453.92,927.02 ; v2(1968.74,2129.69) 1999.69,2129.69 v2@2004.23,2125.15 ; 747.88,1844.64 921.18,1844.64 972.83,1792.99 972.83,1784.1 972.83,1756.42 972.83,1709.04 781.6,1517.81 781.6,1429.87 843.88,1367.59 843.88,1156.36 1073.22,927.02 ; 1073.22,927.02 v2@1453.92,927.02 ; 1073.22,927.02 1091.15,909.09 v2@1435.99,909.09 ; v2@1435.99,909.09 v2@1453.92,927.02
VDD: C4.2 C7.2 R7.2 R12.2 R15.2 R16.1 U2.19 | length 3480.2
  Top Layer w8: C4.2@1113.52,1657 1116.28,1659.76 1150.51,1659.76 1161.83,1648.44 U2.19@1225.32,1648.44
  Top Layer w20: R16.1@1671.27,1157.22 C7.2@1740.13,1157.22 1745.53,1151.82 1751.87,1158.16 v2(1782.1,1158.16) ; R7.2@1992.86,2202.87 R12.2@2068.51,2202.87 ; v2@2035,1758.4 2248.01,1545.39 2291.22,1502.18 2291.22,1264.13 v2(2216.29,1189.2) ; R15.2@2068.51,2133.98 R12.2@2068.51,2202.87 ; v2@2038.13,2290.39 2068.51,2260 ; v2@2038.13,2290.39 2037.33,2291.19 v2(2029.1,2291.19) 2029.89,2290.39 v2@2038.13,2290.39 ; v2@2038.13,2290.39 2067.72,2290.39 v2(2068.51,2289.59) 2068.51,2260 ; R12.2@2068.51,2202.87 2068.51,2260
  Top Layer w30: C4.2@1113.52,1661 1113.77,1661.25 v3(1113.77,1694.19)
  Bottom Layer w20: v3(1113.77,1694.19) 1165.14,1745.56 1652.04,1745.56 1692.58,1705.02 1981.61,1705.02 v2@2035,1758.4 ; v2(1782.1,1158.16) 1783.25,1158.16 1814.29,1189.2 v2(2216.29,1189.2) ; v2(2029.1,2291.19) 2030.69,2289.59 v2(2068.51,2289.59) 2070.43,2287.68 2077.5,2287.68 2078.73,2286.45 2140.36,2286.45 2218.55,2208.26 2218.55,2117.05 2134.04,2032.55 2134.04,1857.45 v2@2035,1758.4 ; v2@2035,1752.98 v2@2035,1758.4
  other v2: 2034,1757.4
VDDA: C10.1 J4.5 J7.3 R12.1 U2.13 | length 2274.6
  Top Layer w8: 1283.64,1963.74 1288.12,1959.26 ; C10.1@1295.2,1915.6 C10.1@1295.2,1916.6 ; U2.13@1368.11,1771.55 1368.11,1833.48 ; C10.1@1295.2,1916.6 1288.12,1923.68 1288.12,1913.47 1368.11,1833.48 ; C10.1@1295.2,1916.6 1368.11,1843.69 1368.11,1833.48
  Top Layer w30: v2(1234.96,1988.31) 1253.53,1969.74 1263.71,1969.74 1288.12,1945.33 C10.1@1288.12,1923.68 ; v2(1257.05,1961.81) v2@1258.98,1963.74 ; v2(2158.19,2205.31) 2158.19,2208 v2(2125.93,2240.26) 2125.93,2206.08 R12.1@2129.14,2202.87 2266.91,2202.87 2401.97,2067.81 J7.3@2406.69,2067.81 2479.67,2067.81 2501.05,2089.19 2605.31,2089.19 J4.5@2606.69,2087.81
  Bottom Layer w30: v2@2125.55,2239.88 2125.55,2237.96 v2(2158.19,2205.31) ; v2(2125.93,2240.26) 2011.78,2240.26 1920.05,2148.53 1762.99,2148.53 1725.56,2185.97 1305.15,2185.97 1257.05,2137.87 1257.05,2010.4 ; 1257.05,2010.4 v2(1257.05,1961.81) 1234.96,1983.89 v2(1234.96,1988.31) 1257.05,2010.4
VIO: C1.2 C3.2 J4.20 R15.1 U2.32 U2.64 | length 3817.9
  Top Layer w8: C1.2@1113.52,1379 1149.65,1379 1163.19,1392.53 ; C1.2@1119.07,1384.16 1146.99,1384.16 1155.36,1392.53 1163.19,1392.53 ; U2.32@1225.32,1392.53 1163.19,1392.53 ; U2.64@1688.07,1687.81 C3.2@1790.71,1687.81
  Top Layer w20: v2(1796.84,1742.67) 1968.47,1742.67 2193.68,1517.46 2193.68,1374.76 ; v2@2205.85,1340.83 2193.68,1353.01 ; v2(2231.03,1337.41) v2@2230.71,1337.73 ; v2@2233.82,1337.73 v2@2230.71,1337.73 ; v2(2484.6,1340.62) v2(2523.74,1340.62) 2659.5,1340.62 J4.20@2706.69,1387.81 ; 2193.68,1353.01 2193.68,1374.76 ; 2193.68,1353.01 v2(2193.68,1337.73) v2@2230.71,1337.73 ; 2193.68,1374.76 v2@2230.71,1337.73 ; R15.1@2129.14,2133.98 2162.18,2133.98 v2(2178.95,2150.75) 2178.95,2148.04 2159.8,2128.89 2159.8,2126.11 v2(2157.88,2124.2) 2138.92,2124.2 R15.1@2129.14,2133.98
  Top Layer w30: C1.2@1113.52,1379 1112.78,1378.26 1112.78,1366.32 v2(1146.73,1332.37) ; C3.2@1789.52,1698 1790.72,1699.19 1790.72,1723.81 1771.72,1742.81 1796.69,1742.81 v2(1796.84,1742.67)
  Bottom Layer w20: v3(1118.09,1347.57) 1130.35,1347.57 1162.37,1347.57 1177.57,1332.37 ; v3@1130.35,1346.04 1144.02,1332.37 v2(1146.73,1332.37) 1177.57,1332.37 ; v3@1771.9,1744.42 1813.71,1744.42 1815.46,1742.67 ; v2(1796.84,1742.67) 1815.46,1742.67 ; v2(2178.95,2150.75) 2177.03,2148.83 2177.03,2146.06 2157.88,2126.91 v2(2157.88,2124.2) 2081.01,2047.32 2081.01,1868.54 1955.14,1742.67 1815.46,1742.67 ; v2@2187.51,1337.1 2230.72,1337.1 v2(2231.03,1337.41) 2232.95,1335.49 2268.83,1335.49 2290.45,1313.87 2455.15,1313.87 ; v2(2193.68,1337.73) 1708.1,1337.73 1675.03,1304.66 1205.29,1304.66 1177.57,1332.37 ; v2@2490.49,1334.73 2469.63,1313.87 2455.15,1313.87 ; v2(2523.74,1340.62) 2496.37,1340.62 v2(2484.6,1340.62) 2481.89,1340.62 2455.15,1313.87
  other v3: 1765.32,1743.27
pads on no net: P2. P2.7 P6.A8 P6.B8 P7.A8 P7.B8 P9.A8 P9.B8 S1.2 S1.4 S2.2 S2.4 S3.0 S3.2 U1. U2.0 U3.2 U3.5 U3.7 U3.8

## Polygon pours and split planes (outlines as drawn)
GND on Bottom Layer "GND" (hatched Horizontal grid 8 track 8, remove dead copper, pour order 0): -3.93,3372.05 -3.93,0 2913.39,0 2913.39,3370.28
GND on Top Layer "GND" (hatched Horizontal grid 8 track 8, remove dead copper, pour order 1): -4.14,3372 2915.07,3372 2915.07,0 -3.25,0

## Keep-outs
Keep-Out Layer:
  lines w10: 2031.5,2553.48 ccw(c2031.5,2573.16) 2031.5,2592.85 881.89,2592.85 ccw(c881.89,2573.16) 881.89,2553.48 2033.45,2553.48 ; 2834.65,0 ccw(c2834.65,0) 2834.65,0 ; 2834.65,0 ccw(c2834.65,78.74) 2913.39,78.74 2913.39,3293.26 ccw(c2834.65,3293.26) 2834.65,3372 78.74,3372 ccw(c78.74,3293.26) 0,3293.26 0,78.74 ccw(c78.74,78.74) 78.74,0 2834.65,0 ; -0.48,2553.48 -0.48,2592.85 645.67,2592.85 cw(c645.67,2573.16) 645.67,2553.48 -0.48,2553.48 ; 2267.72,2553.48 cw(c2267.72,2573.16) 2267.72,2592.85 2913.87,2592.85 2913.87,2553.48 2267.72,2553.48

## Silkscreen, mask and mechanical layers (free items; w line width, h text height)
Top Overlay:
  lines w6: 682.07,3281.28 703.16,3281.28 703.16,3203.64 715.58,3191.22 ; 829.9,2706.3 859.03,2706.3 859.03,2889.26 844.84,2889.26
  lines w10: 377.65,507.81 436.71,507.81 ; 377.65,607.81 436.71,607.81 ; 377.65,707.81 436.71,707.81 ; 377.65,807.81 436.71,807.81 ; 377.65,907.81 436.71,907.81 ; 377.65,1007.81 436.71,1007.81 ; 377.65,1207.81 436.71,1207.81 ; 377.65,1307.81 436.71,1307.81 ; 377.65,1407.81 436.71,1407.81 ; 377.65,1507.81 436.71,1507.81 ; 377.65,1607.81 436.71,1607.81 ; 377.65,1707.81 436.71,1707.81 ; 377.65,1807.81 436.71,1807.81 ; 377.65,1907.81 436.71,1907.81 ; 2476.69,507.81 2535.46,501.93 ; 2476.69,607.81 2535.46,601.93 ; 2476.69,707.81 2535.46,701.93 ; 2476.69,807.81 2535.46,801.93 ; 2476.69,907.81 2535.46,901.93 ; 2476.69,1007.81 2535.46,1001.93 ; 2476.69,1107.81 2535.46,1101.93 ; 2476.69,1207.81 2535.46,1201.93 ; 2476.69,1367.81 2535.46,1373.69 ; 2476.69,1467.81 2535.46,1473.69 ; 2476.69,1567.81 2535.46,1573.69 ; 2476.69,1667.81 2535.46,1673.69 ; 2476.69,1767.81 2535.46,1773.69 ; 2476.69,1867.81 2535.46,1873.69 ; 2476.69,1967.81 2535.46,1973.69 ; 2476.69,2067.81 2535.46,2073.69 ; 2476.69,2167.81 2535.46,2173.69 ; 2476.69,2267.81 2535.46,2273.69
  text "RX1" at 59.43,3219.56 h35
  text "TX_O" at 367.28,3207.89 h35
  text "IAP" at 2137.71,3193.95 h35
  text "TX1" at 63.09,3118 h35
  text "RX_O" at 367.28,3108.67 h35
  text "OFF" at 2443.3,3084.78 h35
  text "ON" at 2600.43,3084.78 h35
  text "RST0" at 16.93,3016.45 h35
  text "3V3" at 367.28,3009.45 h35
  text "GND" at 40.76,2914.9 h35
  text "GND" at 367.28,2910.23 h35
  text "PWR" at 1694.77,2874.99 h35
  text "DIO" at 64.92,2813.34 h35
  text "DIO0" at 367.28,2811.01 h35
  text "CON" at 1696.6,2736.76 h35
  text "CLK" at 48.09,2711.79 h35
  text "CLK0" at 367.28,2711.79 h35
  text "CH32F&Vx0xR-R1-1v2" at 2247.47,2475.56 h40
  text "User" at 1331.94,2375.4 h35
  text "RST" at 1962.17,2375.4 h35
  text "3V3" at 26.5,2283.43 h35
  text "3V3" at 370.49,2283.43 h35
  text "PC0" at 2781.36,2264.89 h35
  text "PB10" at 2221.31,2238.52 h35
  text "3V3" at 366.21,2187.95 h35
  text "3V3" at 26.5,2183.35 h35
  text "PC1" at 2788.86,2164.94 h35
  text "PB11" at 2229.3,2139.05 h35
  text "BOOT1" at 7.58,2083.28 h33
  text "BOOT0" at 371.69,2083.23 h35
  text "PC2" at 2781.36,2064.99 h35
  text "VDDA" at 2205.48,2039.58 h35
  text "GND" at 27.34,1983.2 h35
  text "GND" at 370.49,1982.77 h35
  text "+5V" at 2777.96,1964.52 h35
  text "GND" at 2236.3,1940.11 h35
  text "PD2" at 29.17,1883.12 h35
  text "PC3" at 2781.36,1865.09 h35
  text "PB13" at 2214.31,1840.64 h35
  text "LED1" at 26.59,1783.04 h35
  text "3V3" at 568.63,1783.34 h35
  text "PC4" at 2780.52,1765.14 h35
  text "PB14" at 2212.64,1741.17 h35
  text "LED2" at 19.09,1682.96 h35
  text "NRST" at 568.63,1683.24 h35
  text "PC5" at 2781.36,1665.19 h35
  text "PB15" at 2214.31,1641.7 h35
  text "KEY" at 29.34,1582.88 h35
  text "3V3" at 568.63,1583.14 h35
  text "PC6" at 2782.19,1565.24 h35
  text "PB12" at 2214.31,1542.23 h35
  text "ELED2" at 5.34,1482.8 h35
  text "+5V" at 568.63,1483.03 h35
  text "PC7" at 2781.36,1465.29 h35
  text "PB0" at 2239.97,1442.76 h35
  text "GND" at 27.34,1382.72 h35
  text "GND" at 568.63,1382.93 h35
  text "VIO" at 2793.44,1365.34 h35
  text "PB1" at 2254.97,1343.29 h35
  text "GND" at 27.34,1282.65 h35
  text "GND" at 568.63,1282.83 h35
  text "PC8" at 2454.72,1267.76 h35
  text "PC9" at 2782.19,1265.4 h35
  text "ELED1" at 12.84,1182.57 h35
  text "+5V" at 568.63,1182.73 h35
  text "PA8" at 2236.3,1178.51 h35
  text "PC10" at 2768.53,1165.45 h35
  text "PA15" at 367.57,1084.64 h35
  text "PA14" at 13.67,1082.49 h35
  text "PB9" at 2241.63,1079.24 h35
  text "PC11" at 2776.03,1065.5 h35
  text "PA0" at 568.63,982.54 h35
  text "PA13" at 14.51,982.41 h35
  text "PB8" at 2239.97,979.97 h35
  text "PC12" at 2768.53,965.55 h35
  text "PA12" at 14.51,882.33 h35
  text "PA1" at 568.63,882.44 h35
  text "PB7" at 2239.97,880.7 h35
  text "PC13" at 2768.53,865.6 h35
  text "PA11" at 22.01,782.25 h35
  text "PA2" at 568.63,782.33 h35
  text "PB6" at 2241.63,781.43 h35
  text "VSSA" at 2765.94,765.65 h35
  text "VBAT" at 11.76,682.17 h35
  text "PA3" at 568.63,682.23 h35
  text "PB4" at 2238.3,682.16 h35
  text "PB5" at 2783.19,665.7 h35
  text "PA9" at 2237.97,582.89 h35
  text "PA7" at 27.34,582.09 h35
  text "PA4" at 568.63,582.12 h35
  text "PB3" at 2783.19,565.75 h35
  text "PA10" at 2210.64,483.63 h35
  text "PA6" at 28.17,482.02 h35
  text "PA5" at 568.63,482.02 h35
  text "PB2" at 2786.86,465.8 h32
Bottom Overlay:
  drawing of 8876 lines, arcs and shapes, not listed
  text "http://wch.cn" at 1702.45,1774.95 h98.43
Top Solder:
  drawing of 3656 lines, arcs and shapes, not listed
  text "https://wch.cn" at 2310.7,2638.28 h98.43
Mechanical 1:
  lines w10: 2031.5,2553.38 ccw(c2031.5,2573.16) 2031.5,2592.95 ; 2033.45,2553.48 881.89,2553.48 cw(c881.89,2573.16) 881.89,2592.85 2033.45,2592.85 ; 2913.39,2592.85 2913.39,3293.26 ccw(c2834.65,3293.26) 2834.65,3372 78.74,3372 ccw(c78.74,3293.26) 0,3293.26 0,2592.85 645.67,2592.85 cw(c645.67,2573.16) 645.67,2553.48 0,2553.48 0,78.74 ccw(c78.74,78.74) 78.74,0 2834.65,0 ccw(c2834.65,78.74) 2913.39,78.74 2913.39,2553.48 2267.72,2553.48 cw(c2267.72,2573.16) 2267.72,2592.85 2913.39,2592.85 ; 2913.39,2592.85 2913.39,2592.85

## Text inside footprints (layer, text, board x,y; h text height)
D2: Top Overlay "+" at 1852.45,2753.01 h40 r90
D3: Top Overlay "+" at 1852.45,2886.01 h40 r90
LED1: Top Overlay "+" at 2031.82,2020.01 h40 r90
LED2: Top Overlay "+" at 2031.82,1900.01 h40 r90
PWR: Top Overlay "+" at 1027.46,1032.17 h40 r90